# EAGLE board stoichea_v0.1 (EAGLE 9.0.0)
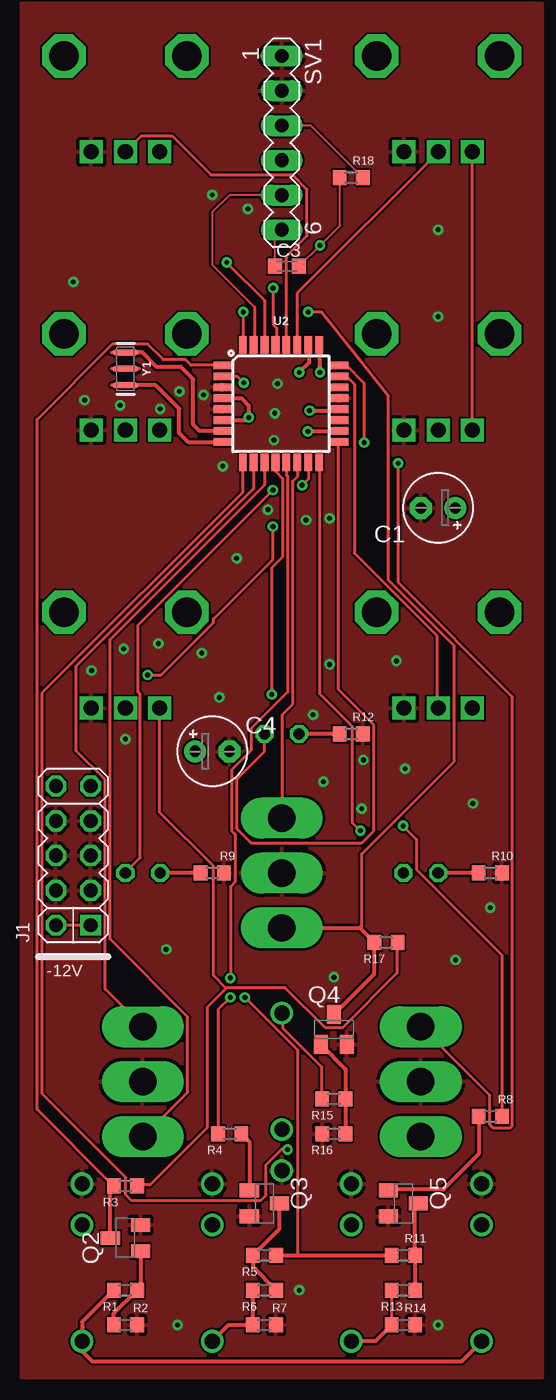
[diagram p0: board, top side]
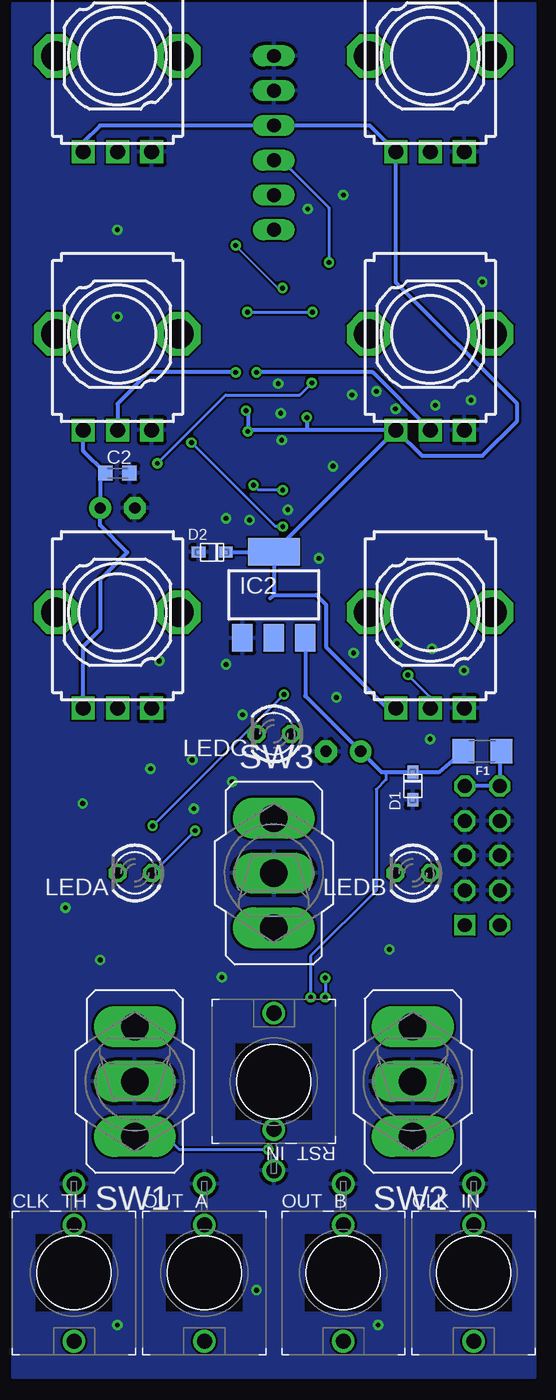
[diagram p1: board, bottom side, seen from below]

No outline drawn. Coordinates in mm, seen from the top.
Copper layers (1*16): Top 0.035mm / dielectric 1.5mm / Bottom 0.035mm
Design rules "default": minimum track width 6mil, minimum drill 0.35mm, track to track 6mil, track to pad 6mil, pad to pad 6mil, via to via 6mil, smd to smd 6mil, copper to edge 40mil, drill to drill 6mil, minimum pad ring 10mil, minimum via ring 8mil, stop-mask expansion 4mil, vias tented up to drill 0mil, thermal gap 10mil
Net classes: 0 default: width 0.203 mm; 1 GND: width 0.305 mm

## Footprints (pad centres in the part's own frame; a part is rotated, then mirrored left to right if it is on the bottom)
E2,5-5 = drill 0.813 pad 1.6: + -1.27,0 | drill 0.813 pad 1.6 octagon: - 1.27,0
C0603K = smd 1.05 x 1.08: 1 -0.875,0; 2 0.875,0
WQP-PJ301M-12_JACK = drill 1.1: P$1_TIP 0,5; P$2_SWITCH 0,-3.5; P$3_SLEEVE 0,-6.5
SOD-323F = smd 1 x 0.8: A -1,0; C 1,0
1206 = smd 1.6 x 1.8: 1 -1.4,0; 2 1.4,0
9MM_PLS = drill 1.1 pad 1.676 square: 1 -2.5,-7; 2 0,-7; 3 2.5,-7 | drill 2.159 pad 3.175 octagon: M1 4.5,0; M2 -4.5,0
SOT223 = smd 1.5 x 2: 1 -2.3,-3.15; 2 0,-3.15; 3 2.3,-3.15 | smd 3.8 x 2: 4 0,3.15
2X05_EUROPWR_OPEN = drill 1.016 square: 1 -5.08,-1.27 | drill 1.016 octagon: 2 -5.08,1.27; 3 -2.54,-1.27; 4 -2.54,1.27; 5 0,-1.27; 6 0,1.27; 7 2.54,-1.27; 8 2.54,1.27; 9 5.08,-1.27; 10 5.08,1.27
LED3MM = drill 0.813 octagon: A -1.27,0; K 1.27,0
SOT23-BEC = smd 1 x 1.4: B -0.95,-1.1; C 0,1.1; E 0.95,-1.1
R0603 = smd 1 x 1.1: 1 -0.85,0; 2 0.85,0
MA06-1 = drill 1.016 long: 1 -6.35,0; 2 -3.81,0; 3 -1.27,0; 4 1.27,0; 5 3.81,0; 6 6.35,0
320-916 = drill 2.007 long: 1 0,4.013; 2 0,0; 3 0,-4.013
TQFP32-08 = smd 1.27 x 0.559: 1 -4.293,2.8; 2 -4.293,2; 3 -4.293,1.2; 4 -4.293,0.4; 5 -4.293,-0.4; 6 -4.293,-1.2; 7 -4.293,-2; 8 -4.293,-2.8; 17 4.293,-2.8; 18 4.293,-2; 19 4.293,-1.2; 20 4.293,-0.4; 21 4.293,0.4; 22 4.293,1.2; 23 4.293,2; 24 4.293,2.8 | smd 0.559 x 1.27: 9 -2.8,-4.293; 10 -2,-4.293; 11 -1.2,-4.293; 12 -0.4,-4.293; 13 0.4,-4.293; 14 1.2,-4.293; 15 2,-4.293; 16 2.8,-4.293; 25 2.8,4.293; 26 2,4.293; 27 1.2,4.293; 28 0.4,4.293; 29 -0.4,4.293; 30 -1.2,4.293; 31 -2,4.293; 32 -2.8,4.293
RESONATOR-SMD-3.2X1.3 = smd 0.45 x 1.905: 1 -1.2,0; 2 0,0; 3 1.2,0

## Placement (x,y rotation side)
C1  [E2,5-5]  30.48,63.5 180 top
C2  100n  [C0603K]  30.48,66.04 0 bottom
C3  100n  [C0603K]  19.43,81.15 0 top
C4  [E2,5-5]  13.97,45.72 0 top
CLK_IN  JACK_THONKICONN-WQP-PJ301M-12  [WQP-PJ301M-12_JACK]  4.45,7.62 180 bottom
CLK_TH  JACK_THONKICONN-WQP-PJ301M-12  [WQP-PJ301M-12_JACK]  33.66,7.62 180 bottom
D1  1N4004  [SOD-323F]  8.89,43.18 90 bottom
D2  1N4004  [SOD-323F]  23.56,60.26 0 bottom
F1  6V/0.5A  [1206]  3.81,45.72 180 bottom
FILL_A  POT_9MM_PCB-PLS  [9MM_PLS]  30.48,55.88 0 bottom
FILL_B  POT_9MM_PCB-PLS  [9MM_PLS]  7.62,55.88 0 bottom
IC2  LD117AS12TR  [SOT223]  19.05,57.15 0 bottom
J1  HEADER-EUROPWR_2X05-OPEN  [2X05_EUROPWR_OPEN]  3.81,38.1 90 top
LEDA  [LED3MM]  29.21,36.83 180 bottom
LEDB  [LED3MM]  8.89,36.83 180 bottom
LEDC  [LED3MM]  19.05,46.99 180 bottom
OUT_A  JACK_THONKICONN-WQP-PJ301M-12  [WQP-PJ301M-12_JACK]  24.13,7.62 180 bottom
OUT_B  JACK_THONKICONN-WQP-PJ301M-12  [WQP-PJ301M-12_JACK]  13.97,7.62 180 bottom
Q2  MMBT3904  [SOT23-BEC]  7.62,10.16 90 top
Q3  MMBT3904  [SOT23-BEC]  17.78,12.7 270 top
Q4  MMBT3904  [SOT23-BEC]  22.86,25.4 0 top
Q5  MMBT3904  [SOT23-BEC]  27.94,12.7 270 top
R1  100k  [R0603]  7.62,6.35 0 top
R2  1m  [R0603]  7.62,3.81 180 top
R3  10k  [R0603]  7.62,13.97 0 top
R4  1k  [R0603]  15.24,17.78 0 top
R5  1k  [R0603]  17.78,8.89 0 top
R6  100R  [R0603]  17.78,6.35 0 top
R7  1k  [R0603]  17.78,3.81 180 top
R8  1k  [R0603]  34.29,19.05 180 top
R9  1K  [R0603]  13.97,36.83 180 top
R10  1K  [R0603]  34.29,36.83 180 top
R11  1k  [R0603]  27.94,8.89 180 top
R12  1K  [R0603]  24.13,46.99 180 top
R13  100R  [R0603]  27.94,6.35 0 top
R14  1k  [R0603]  27.94,3.81 180 top
R15  [R0603]  22.86,20.32 0 top
R16  [R0603]  22.86,17.78 0 top
R17  [R0603]  26.67,31.75 0 top
R18  10k  [R0603]  24.13,87.63 180 top
ROT_A  POT_9MM_PCB-PLS  [9MM_PLS]  30.48,96.52 0 bottom
ROT_B  POT_9MM_PCB-PLS  [9MM_PLS]  7.62,96.52 0 bottom
RST_IN  JACK_THONKICONN-WQP-PJ301M-12  [WQP-PJ301M-12_JACK]  19.05,21.59 0 bottom
STEP_A  POT_9MM_PCB-PLS  [9MM_PLS]  30.48,76.2 0 bottom
STEP_B  POT_9MM_PCB-PLS  [9MM_PLS]  7.62,76.2 0 bottom
SV1  [MA06-1]  19.05,90.17 270 top
SW1  [320-916]  29.21,21.59 180 bottom
SW2  [320-916]  8.89,21.59 180 bottom
SW3  [320-916]  19.05,36.83 0 bottom
U2  ATMEGA328P_TQFP  [TQFP32-08]  18.99,71.12 0 top
Y1  16MHz  [RESONATOR-SMD-3.2X1.3]  7.62,73.66 270 top

## Library data of the parts
C1-C4 CLK_IN CLK_TH FILL_A FILL_B J1 LEDA LEDB LEDC OUT_A OUT_B Q2-Q5 R1-R18 ROT_A ROT_B RST_IN STEP_A STEP_B SW1-SW3 Y1 = 0000-master
D1 D2 = adafruit
F1 = 0000-master; PROD_ID: RES-08585
IC2 = v-reg
SV1 = con-lstb; OC_FARNELL: unknown; OC_NEWARK: unknown
U2 = SparkFun-IC-Microcontroller; PROD_ID: IC-09069

## Nets
5V: C1.+ C2.1 D2.C FILL_A.1 FILL_B.1 IC2.4 R3.2 R17.2 R18.1 ROT_A.1 ROT_B.1 STEP_A.1 STEP_B.1 SV1.3 U2.4 U2.6 U2.18 U2.20
+12V: C4.+ D1.C F1.2 IC2.3 R5.2 R11.2
-12V: J1.1 J1.2
ALTA: SW1.1 U2.9
ALTB: SW2.1 U2.11
CHN: SW3.1 U2.14
CLKIN: Q2.C R3.1 U2.1
N$1: LEDB.K R9.2
N$2: LEDA.K R10.2
N$3: LEDC.K R12.2
N$4: LEDB.A U2.15
N$5: LEDA.A U2.16
N$6: LEDC.A U2.17
N$8: CLK_IN.P$1_TIP CLK_TH.P$1_TIP R1.1
N$9 [GND]: F1.1 J1.9 J1.10
N$11: Q2.B R1.2 R2.2
N$12: Q3.B R4.2
N$13: Q3.C R5.1 R6.2
N$14: OUT_B.P$1_TIP R6.1 R7.2
N$15: Q5.B R8.2
N$16: Q5.C R11.1 R13.2
N$17: OUT_A.P$1_TIP R13.1 R14.2
N$18: R15.1 RST_IN.P$1_TIP
N$19: C3.2 R18.2 U2.29
N$20: Q4.B R15.2 R16.2
N$21: C3.1 SV1.6
N$22: FILL_A.2 U2.23
N$23: FILL_B.2 U2.24
N$24: STEP_A.2 U2.25
N$25: STEP_B.2 U2.26
N$26: ROT_A.2 U2.27
N$27: ROT_B.2 U2.28
N$28: U2.8 Y1.3
N$29: U2.7 Y1.1
OUTA: R8.1 U2.12
OUTB: R4.1 U2.13
PE: C1.- C2.2 C4.- CLK_IN.P$3_SLEEVE CLK_TH.P$3_SLEEVE D1.A D2.A FILL_A.3 FILL_B.3 IC2.1 J1.3 J1.4 J1.5 J1.6 J1.7 J1.8 OUT_A.P$3_SLEEVE OUT_B.P$3_SLEEVE Q2.E Q3.E Q4.E Q5.E R2.1 R7.1 R9.1 R10.1 R12.1 R14.1 R16.1 ROT_A.3 ROT_B.3 RST_IN.P$3_SLEEVE STEP_A.3 STEP_B.3 SV1.1 SV1.2 SW1.2 SW2.2 SW3.2 U2.3 U2.5 U2.21 Y1.2
RSTIN: Q4.C R17.1 SW3.3 U2.32
RX: SV1.4 U2.30
TRIGA: SW1.3 U2.2
TRIGB: SW2.3 U2.10
TX: SV1.5 U2.31

## Tracks (layer width: path | path; a pad name or v marks a point on that pad's centre or on a via)
5V  (via drill 0.35)
  Top 0.152: R18.1 21.17,91.44 SV1.3
  Top 0.203: ROT_A.1 32.98,89.43 32.98,69.25 STEP_A.1 | 14.98,28.4 15.02,28.45 19.29,28.45 22.23,25.51 23.47,25.51 27.47,29.52 27.47,31.74 R17.2 | 14.98,28.4 13.6,27.03 13.6,18.22 9.42,14.05 8.53,14.05 R3.2 | 14.98,28.4 14.05,29.34 14.05,37.34 10.13,41.25 10.13,48.81 FILL_B.1
  Top 0.305: U2.6 16.58,69.92 16.64,69.98 v16.64,70.1 16.64,70.99 16.11,71.52 U2.4 | 21.19,70.72 v21.08,70.61 23.17,70.61 U2.20 | U2.18 23.25,69.09 v20.95,69.09
  Bottom 0.305: FILL_A.1 33.02,48.92 33.02,53.34 31.75,54.61 31.75,58.27 29.77,60.25 31.75,62.23 C1.+ 31.75,65.64 C2.1 32.98,67.67 STEP_A.1 | STEP_B.1 19.05,60.27 | ROT_A.1 32.98,90.13 33.02,90.17 31.75,91.44 SV1.3 12.04,91.44 ROT_B.1 10.12,79.97 1.27,71.12 1.27,69.85 3.81,67.31 8.23,67.31 STEP_B.1 | v21.08,70.61 20.95,70.48 v20.95,69.09 20.84,69.2 16.64,69.2 | STEP_B.1 16.64,69.2 | v16.64,70.1 16.64,69.2 | FILL_B.1 10.78,48.88 15.24,53.34 15.24,56.44 15.95,57.15 19.05,57.15 | 19.32,56.88 19.05,57.15 | IC2.4 19.05,60.27 | 19.05,60.27 19.05,57.15 | D2.C 19.06,60.26 19.05,60.27
+12V  (via drill 0.35)
  Top 0.203: 20.18,8.89 20.18,23.91 v16.36,27.74
  Top 0.305: R5.2 20.18,8.89 R11.2
  Bottom 0.203: v16.36,27.74 16.36,30.76 11.56,35.56 11.56,42.94 10.85,43.65 10.85,44.18
  Bottom 0.305: F1.2 7,44.18 D1.C 10.85,44.18 11.16,44.18 C4.+ 16.51,49.53 16.74,49.76 16.75,49.77 IC2.3
-12V
  Top 0.203: J1.2 2.58,32.98 5.07,32.98 J1.1
ALTA  (via drill 0.35)
  Top 0.203: v19.47,16.62 19.02,16.62 17.87,15.47 17.87,13.25 17.51,12.89 8.09,12.89 7.64,13.34 7.64,14.58 1.51,20.71 1.51,49.96 16.19,64.64 U2.9
  Bottom 0.203: v19.47,16.62 19.56,16.71 19.65,16.62 25.96,16.62 26.85,17.51 29.16,17.51 SW1.1
ALTB
  Top 0.203: SW2.1 8.89,17.51 12.18,20.8 12.18,26.31 6.49,32 6.49,53.87 17.79,65.17 U2.11
CHN
  Top 0.203: SW3.1 19.11,40.89 19.11,48.41 19.82,49.12 19.82,65.43 20.19,65.79 U2.14
CLKIN
  Top 0.203: R3.1 6.67,14.05 1.16,19.56 1.16,69.96 6.67,75.48 9.25,75.48 10.4,74.32 12,74.32 12.4,73.92 U2.1
  Top 0.305: Q2.C 6.52,13.72 R3.1
N$1
  Top 0.305: R9.2 LEDB.K
N$2
  Top 0.305: R10.2 LEDA.K
N$3
  Top 0.305: R12.2 LEDC.K
N$4  (via drill 0.35)
  Top 0.203: v18.4,64.81 8.53,54.94 8.53,50.05 8.71,49.87 8.71,37.96 7.64,36.89 LEDB.A | U2.15 20.99,65.61 v20.54,65.16
  Bottom 0.203: v20.54,65.16 20.18,64.81 v18.4,64.81
N$5  (via drill 0.35)
  Top 0.203: v24.8,39.92 24.18,40.54 24.18,47.56 21.79,49.96 U2.16
  Bottom 0.203: v24.8,39.92 27.91,36.8 LEDA.A
N$6
  Top 0.203: LEDC.A 17.78,45.7 15.73,43.65 15.73,40.09 16.8,39.03 24.89,39.03 25.78,39.92 25.78,47.65 23.2,50.23 23.2,68.24 U2.17
N$8
  Top 0.305: R1.1 4.45,4.03 CLK_IN.P$1_TIP 4.45,1.91 5.18,1.17 32.2,1.17 CLK_TH.P$1_TIP
N$9
  Bottom 0.305: F1.1 2.54,45.34 J1.10 J1.9
N$11
  Top 0.305: Q2.B 8.72,6.6 R1.2 6.77,4.65 R2.2
N$12
  Top 0.305: R4.2 16.68,17.19 Q3.B
N$13
  Top 0.305: R6.2 16.93,8.05 R5.1 18.88,10.84 Q3.C
N$14
  Top 0.305: OUT_B.P$1_TIP 15.16,3.81 R7.2 R6.1
N$15
  Top 0.305: R8.2 33.44,16.3 30.86,13.72 26.91,13.72 Q5.B
N$16
  Top 0.305: Q5.C 28.79,12.45 R11.1 R13.2
N$17
  Top 0.203: R13.1 27.11,6.31 27.11,3.91 R14.2
  Top 0.305: R14.2 25.9,2.62 OUT_A.P$1_TIP
N$18
  Top 0.203: R15.1 21.96,20.36 21.96,22.67 19.11,25.51 19.11,26.58 RST_IN.P$1_TIP
N$19  (via drill 0.35)
  Top 0.152: v18.41,79.57 18.41,79.5 18.64,79.27 | C3.2 v21.84,82.68 23.3,84.14 23.3,87.61 R18.2
  Top 0.203: v18.41,79.57 18.41,76.9 18.67,76.64 18.67,75.5 U2.29 18.67,75.43
  Bottom 0.152: v18.41,79.57 18.73,79.57 v21.84,82.68
N$20
  Top 0.305: R16.2 R15.2 23.71,22.5 Q4.B
N$21
  Top 0.152: C3.1 18.56,83.33 SV1.6
N$22
  Top 0.203: FILL_A.2 30.4,48.9 30.4,54.14 24.36,60.19 24.36,72.54 23.78,73.12 U2.23
N$23  (via drill 0.35)
  Top 0.203: v25.07,68.28 25.07,72.63 23.78,73.92 U2.24 | v18.4,62.14 18.4,59.74 14.05,55.38 14.05,55.12 10.22,51.3 v9.25,51.3
  Bottom 0.203: v25.07,68.28 18.94,62.14 v18.4,62.14 | v9.25,51.3 7.64,49.7 7.64,48.9 FILL_B.2
N$24  (via drill 0.35)
  Top 0.305: v21.84,73.41 21.84,75.41 U2.25
  Bottom 0.305: v21.84,73.41 28.19,73.41 30.48,71.12 STEP_A.2
N$25  (via drill 0.35)
  Top 0.305: v20.32,73.41 21.06,74.14 21.06,75.41 U2.26
  Bottom 0.305: STEP_B.2 11.83,73.41 v20.32,73.41
N$26
  Top 0.203: ROT_A.2 30.4,89.43 20.19,79.22 U2.27
N$27
  Top 0.203: ROT_B.2 7.64,89.52 8.8,90.68 11.02,90.68 13.87,87.83 19.82,87.83 20.89,86.77 20.89,83.39 19.39,81.88 U2.28
N$28
  Top 0.305: U2.8 14.75,68.33 12.19,68.33 11.56,68.96 11.56,70.74 9.84,72.46 Y1.3
N$29
  Top 0.305: U2.7 13.06,69.12 13.06,69.11 12.57,69.6 12.57,72.9 11.68,73.79 9.91,73.79 8.83,74.87 Y1.1
OUTA  (via drill 0.35)
  Top 0.203: v27.91,40.27 28.89,39.29 28.89,37.07 35.12,30.85 35.12,19.11 R8.1 | v18.31,49.87 18.31,59.12 19.11,59.92 19.11,65.65 18.59,66.17 U2.12
  Bottom 0.203: v18.31,49.87 v27.91,40.27
OUTB  (via drill 0.35)
  Top 0.203: v15.29,27.74 14.4,26.85 14.4,17.78 R4.1 | v15.29,29.16 15.29,35.83 15.65,36.18 15.65,39.65 15.38,39.92 15.38,44.36 16.8,45.78 16.8,47.38 19.47,50.05 19.47,65.79 19.39,65.88 U2.13
  Bottom 0.203: v15.29,29.16 v15.29,27.74
PE  (via drill 0.35)
  other vias: 22.1,43.5 25.02,45.09 24.89,41.53 28.07,44.45 14.48,49.66 10.03,53.59 7.49,53.21 7.62,46.61 21.34,48.39 27.43,52.32 22.54,52.07 10.6,31.24 15.75,59.82 11.56,72.01 10.16,70.74 7.24,70.99 13.34,71.75 18.73,72.58 18.54,70.42 18.48,68.45 13.97,86.36 16.57,85.34 30.48,83.82 30.48,77.47 31.75,30.48 34.29,34.29 22.86,29.21 33.02,41.91 22.54,62.74 20.83,62.61 18.03,63.37 14.73,66.55 3.81,80.01 4.64,71.37 13.21,52.9 5.14,51.63 11.43,3.81 20.32,6.35 30.48,3.81
  pour Top: 0,0 38.1,0 38.1,100.33 0,100.33
  pour Bottom: 0,0 38.1,0 38.1,100.33 0,100.33
RSTIN  (via drill 0.35)
  Top 0.203: v20.98,77.81 21.96,77.81 26.85,71.65 26.85,58.23 31.65,53.43 31.65,44.98 24.89,38.23 24.89,32.89 24.75,32.82 | v16.23,77.81 16.23,75.46 U2.32
  Top 0.305: Q4.C 25.82,29.46 R17.1 24.75,32.82 SW3.3
  Bottom 0.203: v20.98,77.81 v16.23,77.81
RX  (via drill 0.35)
  Top 0.203: v15.02,81.43 17.78,78.68 U2.30
  Bottom 0.203: v15.02,81.43 15.02,85.43 18.49,88.9 SV1.4
TRIGA  (via drill 0.35)
  Top 0.203: v27.56,66.76 27.56,58.05 35.92,49.7 35.92,18.4 35.74,18.22 34.49,18.22 34.23,18.49 34.23,20.62 29.25,25.6 SW1.3 | U2.2 15.78,73.12 v16.27,72.63
  Bottom 0.203: v16.27,72.63 17.16,71.74 22.58,71.74 v27.56,66.76
TRIGB
  Top 0.203: SW2.3 6.13,28.36 6.13,43.65 4,45.78 4,51.92 16.99,64.9 U2.10
TX
  Top 0.152: SV1.5 15.24,86.36 13.97,85.09 13.97,81.28 17.07,78.18
  Top 0.203: 19.02,86.32 SV1.5 | 17.07,78.18 17.07,75.5 U2.31

## Text on the board
tDocu: Rebel Tech Stoicheia